# Altium PCB Multislope_Board.PcbDoc (part 1 of 2)
Units mil, origin at the board's own origin, x right, y up, seen from the top; angles counter-clockwise.
Board outline 6000 x 4000 mil, 2 copper layers (Top Layer, Bottom Layer); 93 components, 65 nets, 831 pads, 5 vias.
Unrouted connection lines stored in the file: 171.
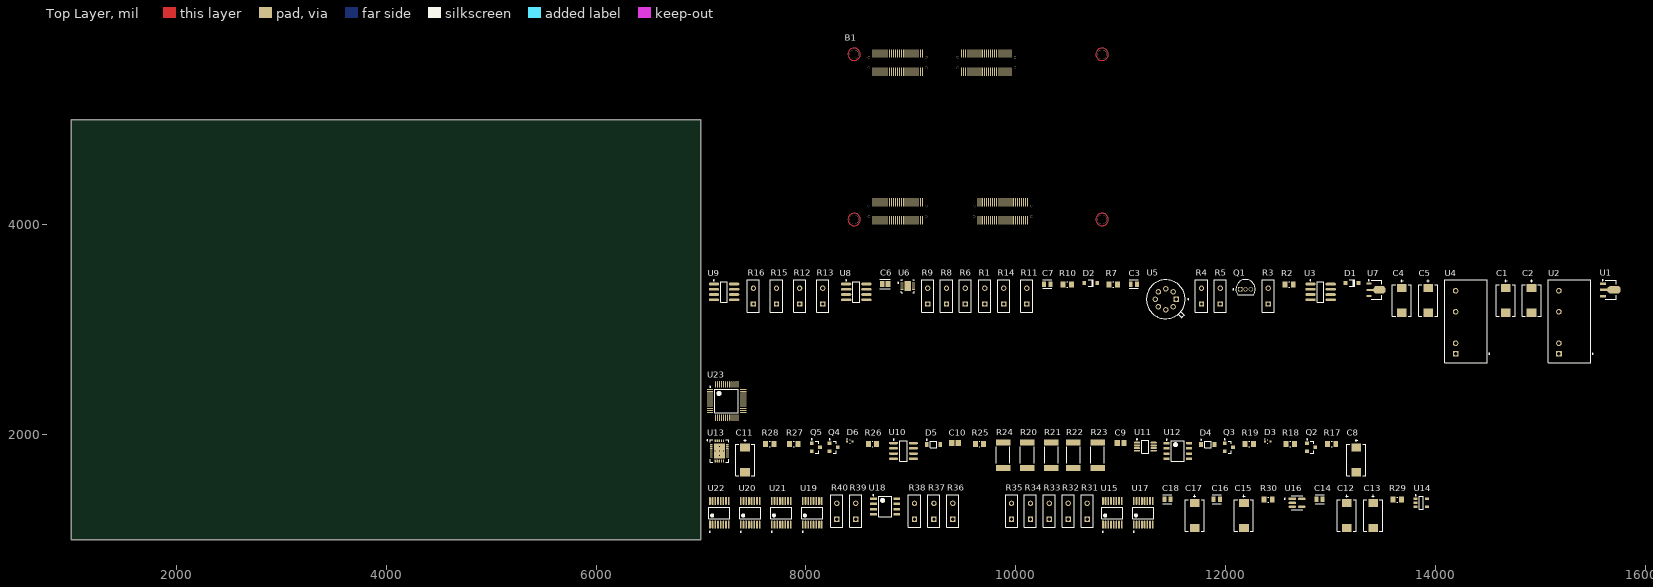
[diagram p0: Top Layer view]
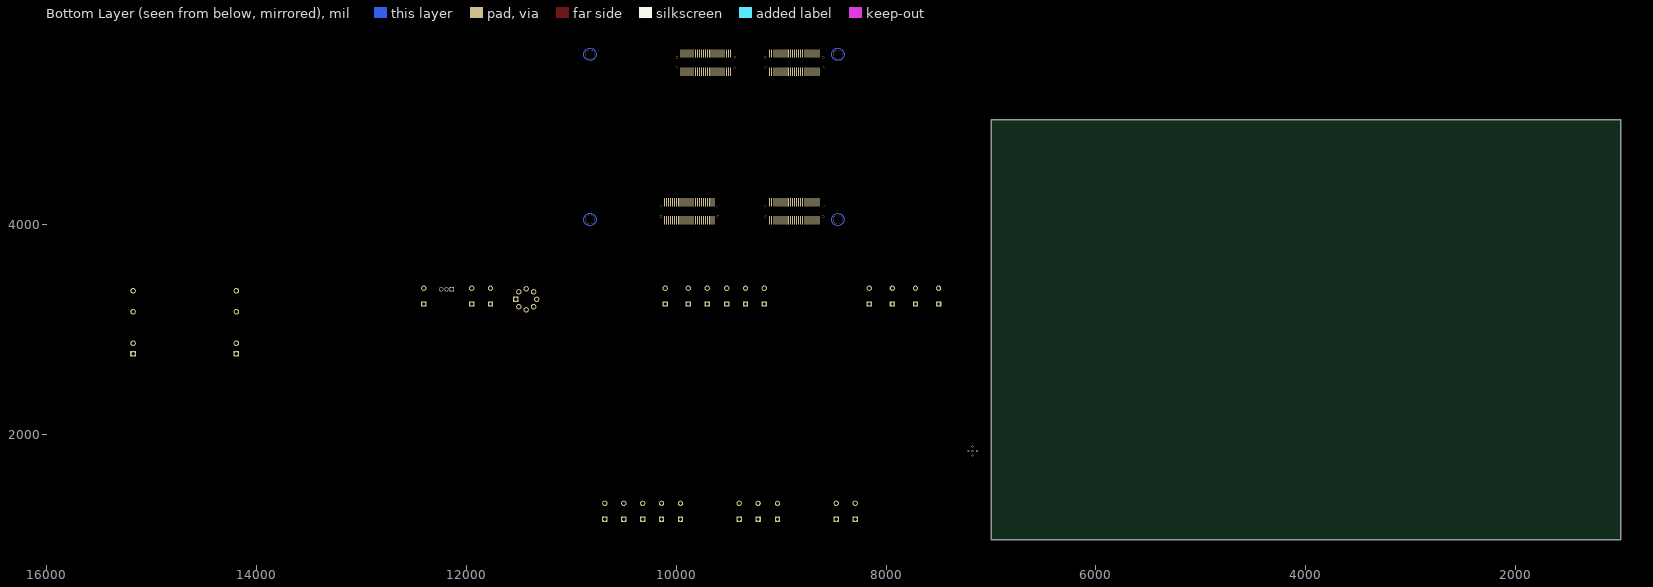
[diagram p1: Bottom Layer view, seen from below]

## Layer stack, top to bottom
Top Solder: solder mask 0.4, Solder Resist, Dk 3.5
Top Layer: signal copper 1.4
Dielectric 1: dielectric 12.6, FR-4, Dk 4.8
Bottom Layer: signal copper 1.4
Bottom Solder: solder mask 0.4, Solder Resist, Dk 3.5

## Board outline
1000,1000 7000,1000 7000,5000 1000,5000

## Design rules (kind name [scope] priority, off if disabled: settings)
Clearance [All] p1: gap=10 ignorepadtopadclearanceinfootprint=FALSE except(0: Arc-Hole Track-Hole SMDPad-Hole THPad-Hole Via-Hole Fill-Hole Poly-Hole Region-Hole Text-Hole)
PolygonConnect [All] p1: connectstyle=Relief reliefconductorwidth=10 reliefentries=4 polygonreliefangle="90 Angle" airgapwidth=10
RoutingVias [All] p1: holewidth=28 width=50 viastyle="Through Hole" minholewidth=28 minwidth=50 maxholewidth=28 maxwidth=50
SolderMaskExpansion [All] p1: expansion=4 istentingtop=FALSE
Width [All] p1: maxlimit=10 minlimit=10 preferedwidth=10
30 further rules are at their usual default settings.

## Classes and differential pairs
component class Vref: C1 C2 C3 C4 C5 C6 C7 D1 D2 Q1 R1 R2 R3 R4 R5 R6 R7 R8 R9 R10 R11 R12 R13 R14 R15 R16 U1 U2 U3 U4 U5 U6 U7 U8 U9
component class MCU: U23
component class Frontend: C8 C9 C10 C11 D3 D4 D5 D6 Q2 Q3 Q4 Q5 R17 R18 R19 R20 R21 R22 R23 R24 R25 R26 R27 R28 U10 U11 U12 U13
component class ADC_Core: B1 C12 C13 C14 C15 C16 C17 C18 R29 R30 R31 R32 R33 R34 R35 R37 R38 R39 R40 U14 U15 U16 U17 U19 U20 U21 U22

## Components (designator, comment, footprint, x,y, rotation, side; value= is the part's Value field where it differs from the comment)
B1 "ALCHITRY_ELEMENT" ELEMENT 10920.83,5722.87 r180 top
C1 "10uF 35V Tantalum" FP-T491D106K035AT-MFG 14670,3280 r90 top
C2 "10uF 35V Tantalum" FP-T491D106K035AT-MFG 14915,3280 r90 top
C3 "100nF" FP-C0805C-DN-MFG 11125,3435 r0 top value="0.10 μF"
C4 "10uF 35V Tantalum" FP-T491D106K035AT-MFG 13680,3280 r90 top
C5 "10uF 35V Tantalum" FP-T491D106K035AT-MFG 13930,3280 r90 top
C6 "08051A101JAT2A" FP-0805-L_2_01_0_2-W_1_25-IPC_C 8755,3435 r0 top
C7 "20nF" FP-C0805C-DN-MFG 10300,3435 r0 top value="0.10 μF"
C8 "T491D106K025AT" FP-T491D-MFG 13245,1760 r90 top
C9 "08055C104K4Z2A" CAPC2013X140X50NL20T25 11000,1920 r0 top
C10 "08055C104K4Z2A" CAPC2013X140X50NL20T25 9420,1920 r0 top
C11 "T491D106K025AT" FP-T491D-MFG 7420,1760 r90 top
C12 "10uF 35V Tantalum" FP-T491D106K035AT-MFG 13155,1230 r90 top
C13 "10uF 35V Tantalum" FP-T491D106K035AT-MFG 13405,1230 r90 top
C14 "100nF" FP-C0805C-DN-MFG 12895,1385 r0 top value="0.10 μF"
C15 "10uF 35V Tantalum" FP-T491D106K035AT-MFG 12175,1230 r90 top
C16 "100nF" FP-C0805C-DN-MFG 11915,1385 r0 top value="0.10 μF"
C17 "10uF 35V Tantalum" FP-T491D106K035AT-MFG 11705,1230 r90 top
C18 "10nF" FP-C0805C-DN-MFG 11445,1385 r0 top value="0.10 μF"
D1 "1N4148W-7-F" DIOD-SOD123-2_V 13205,3445 r0 top
D2 "1N4148W-7-F" DIOD-SOD123-2_V 10715,3445 r0 top
D3 "BAS716" ONSC-SOD-523-2-502-01_V 12400,1935 r0 top
D4 "MMSZ4680T1G" ONSC-SOD-123-2-425-04_V 11830,1905 r0 top
D5 "MMSZ4680T1G" ONSC-SOD-123-2-425-04_V 9215,1905 r0 top
D6 "BAS716" ONSC-SOD-523-2-502-01_V 8420,1935 r0 top
Q1 "2N3904" ONSC-TO-92-3-29-11 12190,3385 r0 top
Q2 "MMBF4391LT1G" ONSC-SOT-23-3-318-08_V 12815,1880 r0 top
Q3 "MMBF4391LT1G" ONSC-SOT-23-3-318-08_V 12030,1880 r0 top
Q4 "MMBF4391LT1G" ONSC-SOT-23-3-318-08_V 8265,1880 r0 top
Q5 "MMBF4391LT1G" ONSC-SOT-23-3-318-08_V 8095,1880 r0 top
R1 "VPG 3K5" FP-S102J-MFG 9705,3320 r90 top
R2 "1K" RESC2013X60X35ML10T20 12605,3430 r0 top
R3 "VPG 13K" FP-S102J-MFG 12405,3320 r90 top
R4 "VPG 70K" FP-S102J-MFG 11770,3320 r90 top
R5 "VPG 70K" FP-S102J-MFG 11950,3320 r90 top
R6 "VPG 10K" FP-S102J-MFG 9520,3320 r90 top
R7 "1M" RESC2013X60X35ML10T20 10930,3430 r0 top
R8 "VPG 3K5" FP-S102J-MFG 9340,3320 r90 top
R9 "VPG 3K5" FP-S102J-MFG 9160,3320 r90 top
R10 "10K" RESC2013X60X35ML10T20 10490,3430 r0 top
R11 "VPG 1K" FP-S102J-MFG 10105,3320 r90 top
R12 "VPG 10K" FP-S102J-MFG 7940,3320 r90 top
R13 "VPG 3K5" FP-S102J-MFG 8160,3320 r90 top
R14 "VPG 120R" FP-S102J-MFG 9885,3320 r90 top
R15 "VPG 3K5" FP-S102J-MFG 7720,3320 r90 top
R16 "VPG 3K5" FP-S102J-MFG 7500,3320 r90 top
R17 "47K" RESC2013X60X35ML10T20 13010,1910 r0 top
R18 "1K" RESC2013X60X35ML10T20 12615,1910 r0 top
R19 "10R" RESC2013X60X35ML10T20 12225,1910 r0 top
R20 "10K 2512" FP-CRCW2512-e3-MFG 10110,1805 r90 top
R21 "10K 2512" FP-CRCW2512-e3-MFG 10340,1805 r90 top
R22 "10K 2512" FP-CRCW2512-e3-MFG 10550,1805 r90 top
R23 "10K 2512" FP-CRCW2512-e3-MFG 10780,1805 r90 top
R24 "10K 2512" FP-CRCW2512-e3-MFG 9880,1805 r90 top
R25 "200K" RESC2013X60X35ML10T20 9655,1910 r0 top
R26 "10R" RESC2013X60X35ML10T20 8635,1910 r0 top
R27 "1K" RESC2013X60X35ML10T20 7885,1910 r0 top
R28 "47K" RESC2013X60X35ML10T20 7655,1910 r0 top
R29 "1K" RESC2013X60X35ML10T20 13635,1380 r0 top
R30 "220R" RESC2013X60X35ML10T20 12405,1380 r0 top
R31 "VPG" FP-S102J-MFG 10680,1270 r90 top
R32 "VPG" FP-S102J-MFG 10500,1270 r90 top
R33 "VPG" FP-S102J-MFG 10320,1270 r90 top
R34 "VPG" FP-S102J-MFG 10140,1270 r90 top
R35 "VPG" FP-S102J-MFG 9960,1270 r90 top
R36 "VPG" FP-S102J-MFG 9400,1270 r90 top
R37 "VPG" FP-S102J-MFG 9220,1270 r90 top
R38 "VPG" FP-S102J-MFG 9035,1270 r90 top
R39 "VPG" FP-S102J-MFG 8475,1270 r90 top
R40 "VPG" FP-S102J-MFG 8295,1270 r90 top
U1 "L78L15ABUTR" SOT-89_N 15670,3380 r0 top
U2 "R05P215S/P" FP-RxxP2xx-MFG 15275,3080 r90 top
U3 "LT1013DS8#PBF" LT-S8-8_M 12905,3360 r0 top
U4 "R05P215S/P" FP-RxxP2xx-MFG 14290,3080 r90 top
U5 "LTZ1000ACH#PBF" FP-H-8-05-08-1320-MFG 11430,3290 r0 top
U6 "ADA4523-1BCPZ" FP-CP-8-29-MFG 8970,3415 r0 top
U7 "L79L15ACUTR" SOT-89_L 13435,3380 r0 top
U8 "LT1128CS8#PBF" LT-S8-8_M 8480,3360 r0 top
U9 "LT1128CS8#PBF" LT-S8-8_M 7220,3360 r0 top
U10 "LT1678CS8#PBF" LT-S8-8_N 8930,1845 r0 top
U11 "ADA4528-1ARMZ" ADI-RM-8_L 11235,1885 r0 top
U12 "TL061IDR" D0008A_N 11545,1845 r0 top
U13 "AD5760BCPZ" CP-24-5_L 7175,1845 r0 top
U14 "TLV70025DDCR" DDC0005A_N 13865,1350 r0 top
U15 "TMUX1133PWR" FP-PW0016A-IPC_A 10920,1255 r90 top
U16 "TLV70033DDCR" FP-DDC0005A-IPC_A 12680,1350 r0 top
U17 "TMUX1133PWR" FP-PW0016A-IPC_A 11215,1255 r90 top
U18 "OPA140AID" D0008A_M 8755,1315 r0 top
U19 "TMUX1133PWR" FP-PW0016A-IPC_A 8060,1255 r90 top
U20 "TMUX1133PWR" FP-PW0016A-IPC_A 7470,1255 r90 top
U21 "TMUX1133PWR" FP-PW0016A-IPC_A 7765,1255 r90 top
U22 "TMUX1133PWR" FP-PW0016A-IPC_A 7175,1255 r90 top
U23 "STM32F103CBT6" STM-LQFP48_L 7245,2320 r0 top

## Footprints (in the part's own frame and the unit in brackets; to place one, negate y for a bottom-side part, rotate by r counter-clockwise, add the part's x,y. Pads: shape width x height; smd on the part's side, far side on the other; paste and mask are expansions set on the pad)
ADI-RM-8_L [mm] "SOP, 8-Leads, Body 3x3mm, Pitch 0.65mm, IPC High Density"
  oval 1.5x0.45 smd: 1(-2.025,0.975) 2(-2.025,0.325) 3(-2.025,-0.325) 4(-2.025,-0.975) 5(2.025,-0.975) 6(2.025,-0.325) 7(2.025,0.325) 8(2.025,0.975)
  silkscreen extent -2.15,-1.6 0.87,1.87, body extent -1.6,-1.6 1.6,1.6, height 1.1
CAPC2013X140X50NL20T25 [mm] "Chip Capacitor, 2-Leads, Body 2.00x1.25mm, IPC Medium Density"
  rect 1.3x1.45 smd: 1(-0.8,0) 2(0.8,0)
  body extent -1.1,-0.72 1.1,0.72, height 1.4
CP-24-5_L [mm] "QFN, 24-Leads, Body 4x5mm, Pitch 0.5mm, Thermal Pad 2.65x3.65mm, IPC High Density"
  oval 0.7x0.3 smd: 1(-1.95,1.5) 2(-1.95,1) 3(-1.95,0.5) 4(-1.95,0) 5(-1.95,-0.5) 6(-1.95,-1) 7(-1.95,-1.5) 13(1.95,-1.5) 14(1.95,-1) 15(1.95,-0.5) 16(1.95,0) 17(1.95,0.5) 18(1.95,1) 19(1.95,1.5)
  oval 0.3x0.7 smd: 8(-1,-2.45) 9(-0.5,-2.45) 10(0,-2.45) 11(0.5,-2.45) 12(1,-2.45) 20(1,2.45) 21(0.5,2.45) 22(0,2.45) 23(-0.5,2.45) 24(-1,2.45)
  rect 2.65x3.65 smd paste-1.325: 25(0,0)
  silkscreen extent -3,-2.73 2.23,2.73, body extent -2.07,-2.57 2.08,2.58, height 1
D0008A_M [mm] "SOIC, 8-Leads, Body 5x4mm, Pitch 1.27mm, IPC Low Density"
  rrect15% 1.65x0.65 smd: 1(-2.825,1.905) 2(-2.825,0.635) 3(-2.825,-0.635) 4(-2.825,-1.905) 5(2.825,-1.905) 6(2.825,-0.635) 7(2.825,0.635) 8(2.825,1.905)
  silkscreen extent -2.95,-2.5 1.6,2.9, body extent -3,-2.45 3,2.45, height 1.63
D0008A_N [mm] "SOIC, 8-Leads, Body 5x4mm, Pitch 1.27mm, IPC Medium Density"
  rrect17% 1.45x0.6 smd: 1(-2.725,1.905) 2(-2.725,0.635) 3(-2.725,-0.635) 4(-2.725,-1.905) 5(2.725,-1.905) 6(2.725,-0.635) 7(2.725,0.635) 8(2.725,1.905)
  silkscreen extent -2.85,-2.5 1.6,2.88, body extent -3,-2.45 3,2.45, height 1.63
DDC0005A_N [mm] "SOT23, 5-Leads, Body 3.05x1.75mm, Pitch 0.95mm, IPC Medium Density"
  rrect17% 1x0.6 smd: 1(-1.375,0.95) 2(-1.375,0) 3(-1.375,-0.95) 4(1.375,-0.95) 5(1.375,0.95)
  silkscreen extent -1.5,-1.55 0.5,1.92, body extent -0.88,-1.52 0.87,1.53, height 1.1
DIOD-SOD123-2_V [mm] "SOD123, 2-Leads, Body 2.7x1.55mm, Height 1.45mm"
  rect 0.9x0.95 smd: 1(-1.575,0) 2(1.575,0)
  silkscreen extent -0.64,-0.82 0.64,0.77, body extent -1.35,-0.77 1.35,0.77, height 1.45
ELEMENT [mm]
  rect 0.25x2 smd far side: AB_1(20.5,38.3) AB_2(21,38.3) AB_3(21.5,38.3) AB_4(22,38.3) AB_5(22.5,38.3) AB_6(23,38.3) AB_7(23.5,38.3) AB_8(24,38.3) AB_9(24.5,38.3) AB_10(25,38.3) AB_11(25.5,38.3) AB_12(26,38.3) AB_13(26.5,38.3) AB_14(27,38.3) AB_15(27.5,38.3) AB_16(28,38.3) AB_17(28.5,38.3) AB_18(29,38.3) AB_19(29.5,38.3) AB_20(30,38.3) AB_21(30.5,38.3) AB_22(31,38.3) AB_23(31.5,38.3) AB_24(32,38.3) AB_25(32.5,38.3) AB_26(32.5,42.7) AB_27(32,42.7) AB_28(31.5,42.7) AB_29(31,42.7) AB_30(30.5,42.7) AB_31(30,42.7) AB_32(29.5,42.7) AB_33(29,42.7) AB_34(28.5,42.7) AB_35(28,42.7) AB_36(27.5,42.7) AB_37(27,42.7) AB_38(26.5,42.7) AB_39(26,42.7) AB_40(25.5,42.7) AB_41(25,42.7) AB_42(24.5,42.7) AB_43(24,42.7) AB_44(23.5,42.7) AB_45(23,42.7) AB_46(22.5,42.7) AB_47(22,42.7) AB_48(21.5,42.7) AB_49(21,42.7) AB_50(20.5,42.7) BB_1(46,38.3) BB_2(46.5,38.3) BB_3(47,38.3) BB_4(47.5,38.3) BB_5(48,38.3) BB_6(48.5,38.3) BB_7(49,38.3) BB_8(49.5,38.3) BB_9(50,38.3) BB_10(50.5,38.3) BB_11(51,38.3) BB_12(51.5,38.3) BB_13(52,38.3) BB_14(52.5,38.3) BB_15(53,38.3) BB_16(53.5,38.3) BB_17(54,38.3) BB_18(54.5,38.3) BB_19(55,38.3) BB_20(55.5,38.3) BB_21(56,38.3) BB_22(56.5,38.3) BB_23(57,38.3) BB_24(57.5,38.3) BB_25(58,38.3) BB_26(58,42.7) BB_27(57.5,42.7) BB_28(57,42.7) BB_29(56.5,42.7) BB_30(56,42.7) BB_31(55.5,42.7) BB_32(55,42.7) BB_33(54.5,42.7) BB_34(54,42.7) BB_35(53.5,42.7) BB_36(53,42.7) BB_37(52.5,42.7) BB_38(52,42.7) BB_39(51.5,42.7) BB_40(51,42.7) BB_41(50.5,42.7) BB_42(50,42.7) BB_43(49.5,42.7) BB_44(49,42.7) BB_45(48.5,42.7) BB_46(48,42.7) BB_47(47.5,42.7) BB_48(47,42.7) BB_49(46.5,42.7) BB_50(46,42.7) CB_1(24.5,2.3) CB_2(25,2.3) CB_3(25.5,2.3) CB_4(26,2.3) CB_5(26.5,2.3) CB_6(27,2.3) CB_7(27.5,2.3) CB_8(28,2.3) CB_9(28.5,2.3) CB_10(29,2.3) CB_11(29.5,2.3) CB_12(30,2.3) CB_13(30.5,2.3) CB_14(31,2.3) CB_15(31.5,2.3) CB_16(32,2.3) CB_17(32.5,2.3) CB_18(33,2.3) CB_19(33.5,2.3) CB_20(34,2.3) CB_21(34.5,2.3) CB_22(35,2.3) CB_23(35.5,2.3) CB_24(36,2.3) CB_25(36.5,2.3) CB_26(36.5,6.7) CB_27(36,6.7) CB_28(35.5,6.7) CB_29(35,6.7) CB_30(34.5,6.7) CB_31(34,6.7) CB_32(33.5,6.7) CB_33(33,6.7) CB_34(32.5,6.7) CB_35(32,6.7) CB_36(31.5,6.7) CB_37(31,6.7) CB_38(30.5,6.7) CB_39(30,6.7) CB_40(29.5,6.7) CB_41(29,6.7) CB_42(28.5,6.7) CB_43(28,6.7) CB_44(27.5,6.7) CB_45(27,6.7) CB_46(26.5,6.7) CB_47(26,6.7) CB_48(25.5,6.7) CB_49(25,6.7) CB_50(24.5,6.7) DB_1(46,2.3) DB_2(46.5,2.3) DB_3(47,2.3) DB_4(47.5,2.3) DB_5(48,2.3) DB_6(48.5,2.3) DB_7(49,2.3) DB_8(49.5,2.3) DB_9(50,2.3) DB_10(50.5,2.3) DB_11(51,2.3) DB_12(51.5,2.3) DB_13(52,2.3) DB_14(52.5,2.3) DB_15(53,2.3) DB_16(53.5,2.3) DB_17(54,2.3) DB_18(54.5,2.3) DB_19(55,2.3) DB_20(55.5,2.3) DB_21(56,2.3) DB_22(56.5,2.3) DB_23(57,2.3) DB_24(57.5,2.3) DB_25(58,2.3) DB_26(58,6.7) DB_27(57.5,6.7) DB_28(57,6.7) DB_29(56.5,6.7) DB_30(56,6.7) DB_31(55.5,6.7) DB_32(55,6.7) DB_33(54.5,6.7) DB_34(54,6.7) DB_35(53.5,6.7) DB_36(53,6.7) DB_37(52.5,6.7) DB_38(52,6.7) DB_39(51.5,6.7) DB_40(51,6.7) DB_41(50.5,6.7) DB_42(50,6.7) DB_43(49.5,6.7) DB_44(49,6.7) DB_45(48.5,6.7) DB_46(48,6.7) DB_47(47.5,6.7) DB_48(47,6.7) DB_49(46.5,6.7) DB_50(46,6.7)
  rect 0.25x2 smd: AT_1(20.5,38.3) AT_2(21,38.3) AT_3(21.5,38.3) AT_4(22,38.3) AT_5(22.5,38.3) AT_6(23,38.3) AT_7(23.5,38.3) AT_8(24,38.3) AT_9(24.5,38.3) AT_10(25,38.3) AT_11(25.5,38.3) AT_12(26,38.3) AT_13(26.5,38.3) AT_14(27,38.3) AT_15(27.5,38.3) AT_16(28,38.3) AT_17(28.5,38.3) AT_18(29,38.3) AT_19(29.5,38.3) AT_20(30,38.3) AT_21(30.5,38.3) AT_22(31,38.3) AT_23(31.5,38.3) AT_24(32,38.3) AT_25(32.5,38.3) AT_26(32.5,42.7) AT_27(32,42.7) AT_28(31.5,42.7) AT_29(31,42.7) AT_30(30.5,42.7) AT_31(30,42.7) AT_32(29.5,42.7) AT_33(29,42.7) AT_34(28.5,42.7) AT_35(28,42.7) AT_36(27.5,42.7) AT_37(27,42.7) AT_38(26.5,42.7) AT_39(26,42.7) AT_40(25.5,42.7) AT_41(25,42.7) AT_42(24.5,42.7) AT_43(24,42.7) AT_44(23.5,42.7) AT_45(23,42.7) AT_46(22.5,42.7) AT_47(22,42.7) AT_48(21.5,42.7) AT_49(21,42.7) AT_50(20.5,42.7) BT_1(46,38.3) BT_2(46.5,38.3) BT_3(47,38.3) BT_4(47.5,38.3) BT_5(48,38.3) BT_6(48.5,38.3) BT_7(49,38.3) BT_8(49.5,38.3) BT_9(50,38.3) BT_10(50.5,38.3) BT_11(51,38.3) BT_12(51.5,38.3) BT_13(52,38.3) BT_14(52.5,38.3) BT_15(53,38.3) BT_16(53.5,38.3) BT_17(54,38.3) BT_18(54.5,38.3) BT_19(55,38.3) BT_20(55.5,38.3) BT_21(56,38.3) BT_22(56.5,38.3) BT_23(57,38.3) BT_24(57.5,38.3) BT_25(58,38.3) BT_26(58,42.7) BT_27(57.5,42.7) BT_28(57,42.7) BT_29(56.5,42.7) BT_30(56,42.7) BT_31(55.5,42.7) BT_32(55,42.7) BT_33(54.5,42.7) BT_34(54,42.7) BT_35(53.5,42.7) BT_36(53,42.7) BT_37(52.5,42.7) BT_38(52,42.7) BT_39(51.5,42.7) BT_40(51,42.7) BT_41(50.5,42.7) BT_42(50,42.7) BT_43(49.5,42.7) BT_44(49,42.7) BT_45(48.5,42.7) BT_46(48,42.7) BT_47(47.5,42.7) BT_48(47,42.7) BT_49(46.5,42.7) BT_50(46,42.7) CT_1(24.5,2.3) CT_2(25,2.3) CT_3(25.5,2.3) CT_4(26,2.3) CT_5(26.5,2.3) CT_6(27,2.3) CT_7(27.5,2.3) CT_8(28,2.3) CT_9(28.5,2.3) CT_10(29,2.3) CT_11(29.5,2.3) CT_12(30,2.3) CT_13(30.5,2.3) CT_14(31,2.3) CT_15(31.5,2.3) CT_16(32,2.3) CT_17(32.5,2.3) CT_18(33,2.3) CT_19(33.5,2.3) CT_20(34,2.3) CT_21(34.5,2.3) CT_22(35,2.3) CT_23(35.5,2.3) CT_24(36,2.3) CT_25(36.5,2.3) CT_26(36.5,6.7) CT_27(36,6.7) CT_28(35.5,6.7) CT_29(35,6.7) CT_30(34.5,6.7) CT_31(34,6.7) CT_32(33.5,6.7) CT_33(33,6.7) CT_34(32.5,6.7) CT_35(32,6.7) CT_36(31.5,6.7) CT_37(31,6.7) CT_38(30.5,6.7) CT_39(30,6.7) CT_40(29.5,6.7) CT_41(29,6.7) CT_42(28.5,6.7) CT_43(28,6.7) CT_44(27.5,6.7) CT_45(27,6.7) CT_46(26.5,6.7) CT_47(26,6.7) CT_48(25.5,6.7) CT_49(25,6.7) CT_50(24.5,6.7) DT_1(46,2.3) DT_2(46.5,2.3) DT_3(47,2.3) DT_4(47.5,2.3) DT_5(48,2.3) DT_6(48.5,2.3) DT_7(49,2.3) DT_8(49.5,2.3) DT_9(50,2.3) DT_10(50.5,2.3) DT_11(51,2.3) DT_12(51.5,2.3) DT_13(52,2.3) DT_14(52.5,2.3) DT_15(53,2.3) DT_16(53.5,2.3) DT_17(54,2.3) DT_18(54.5,2.3) DT_19(55,2.3) DT_20(55.5,2.3) DT_21(56,2.3) DT_22(56.5,2.3) DT_23(57,2.3) DT_24(57.5,2.3) DT_25(58,2.3) DT_26(58,6.7) DT_27(57.5,6.7) DT_28(57,6.7) DT_29(56.5,6.7) DT_30(56,6.7) DT_31(55.5,6.7) DT_32(55,6.7) DT_33(54.5,6.7) DT_34(54,6.7) DT_35(53.5,6.7) DT_36(53,6.7) DT_37(52.5,6.7) DT_38(52,6.7) DT_39(51.5,6.7) DT_40(51,6.7) DT_41(50.5,6.7) DT_42(50,6.7) DT_43(49.5,6.7) DT_44(49,6.7) DT_45(48.5,6.7) DT_46(48,6.7) DT_47(47.5,6.7) DT_48(47,6.7) DT_49(46.5,6.7) DT_50(46,6.7)
  round 2.2 hole 2.2 unplated: MH1(2.5,2.5) MH2(2.5,42.5) MH3(62.5,42.5) MH4(62.5,2.5)
  round 0.55 hole 0.55 unplated: MH5(58.95,39.25) MH6(45.05,39.25) MH7(33.45,39.25) MH8(19.55,39.25) MH9(58.95,3.25) MH10(45.05,3.25) MH11(37.45,3.25) MH12(23.55,3.25) MH13(58.95,5.75) MH14(45.05,5.75) MH15(37.45,5.75) MH16(23.55,5.75) MH17(58.95,41.75) MH18(45.05,41.75) MH19(33.45,41.75) MH20(19.55,41.75)
  Top Layer circle w0.254: c62.5,2.5 r1.5
  Top Layer circle w0.254: c62.5,42.5 r1.5
  Top Layer circle w0.254: c2.5,42.5 r1.5
  Top Layer circle w0.254: c2.5,2.5 r1.5
  Bottom Layer circle w0.254: c2.5,2.5 r1.5
  Bottom Layer circle w0.254: c2.5,42.5 r1.5
  Bottom Layer circle w0.254: c62.5,42.5 r1.5
  Bottom Layer circle w0.254: c62.5,2.5 r1.5
FP-0805-L_2_01_0_2-W_1_25-IPC_C [mil]
  rect 43.49x53.39 smd paste+0 mask+0: 1(-27.79,0) 2(27.79,0)
  silkscreen extent -50,-44 50,44, body extent -53,-32 53,32, height 10
FP-C0805C-DN-MFG [mm]
  rect 0.95x1.35 smd paste+0 mask+0: 1(-0.75,0) 2(0.75,0)
  silkscreen extent -1.1,-1.07 1.1,1.07, body extent -1.4,-0.85 1.4,0.85, height 0.25
FP-CP-8-29-MFG [mm]
  rect 0.7x0.25 smd paste+0 mask+0: 1(-1.4,0.75) 2(-1.4,0.25) 3(-1.4,-0.25) 4(-1.4,-0.75) 5(1.4,-0.75) 6(1.4,-0.25) 7(1.4,0.25) 8(1.4,0.75)
  rect 1.65x2.38 smd paste+0 mask+0: 9(0,0)
  silkscreen extent -2.42,-1.55 1.55,1.55, body extent -1.85,-1.65 1.85,1.65, height 0.25
FP-CRCW2512-e3-MFG [mm]
  rect 1.45x3.5 smd paste+0 mask+0: 1(-3.1,0) 2(3.1,0)
  silkscreen extent -2,-1.65 2,1.65, body extent -3.93,-1.85 3.93,1.85, height 0.25
FP-DDC0005A-IPC_A [mm]
  rect 1.854x0.612 smd paste+0 mask+0: 1(-1.15,0.95)
  rrect100% 1.854x0.612 smd paste+0 mask+0: 2(-1.15,0) 3(-1.15,-0.95) 4(1.15,-0.95) 5(1.15,0.95)
  silkscreen extent -3.05,-1.7 1.4,1.7, body extent -2.58,-1.95 2.58,1.95, height 0.25
FP-H-8-05-08-1320-MFG [mm]
  rect 1.3x1.3 hole 0.8 paste-1000 mask+0: 1(2.54,0)
  round 1.3 hole 0.8 paste-1000 mask+0: 2(1.796,1.796) 3(0,2.54) 4(-1.796,1.796) 5(-2.54,0) 6(-1.796,-1.796) 7(0,-2.54) 8(1.796,-1.796)
  silkscreen extent -4.7,-4.7 5.6,4.7, body extent -4.8,-4.8 4.8,4.8, height 0.25
FP-PW0016A-IPC_A [mm]
  rect 1.955x0.421 smd paste+0 mask+0: 1(-2.875,2.275)
  rrect100% 1.955x0.421 smd paste+0 mask+0: 2(-2.875,1.625) 3(-2.875,0.975) 4(-2.875,0.325) 5(-2.875,-0.325) 6(-2.875,-0.975) 7(-2.875,-1.625) 8(-2.875,-2.275) 9(2.875,-2.275) 10(2.875,-1.625) 11(2.875,-0.975) 12(2.875,-0.325) 13(2.875,0.325) 14(2.875,0.975) 15(2.875,1.625) 16(2.875,2.275)
  silkscreen extent -4.73,-2.5 1.4,2.5, body extent -4.35,-3 4.35,3, height 0.25
FP-RxxP2xx-MFG [mm]
  rect 1.35x1.35 hole 0.85 paste-1000 mask+0: 1(-7.85,2.5)
  round 1.35 hole 0.85 paste-1000 mask+0: 2(-5.31,2.5) 5(2.31,2.5) 7(7.39,2.5)
  silkscreen extent -10,-5.75 10,5.15, body extent -10.1,-5.25 10.1,5.25, height 0.25
FP-S102J-MFG [mm]
  rect 1.3x1.3 hole 0.8 paste-1000 mask+0: 1(-1.905,0)
  round 1.3 hole 0.8 paste-1000 mask+0: 2(1.905,0)
  silkscreen extent -3.94,-1.46 3.94,1.46, body extent -4.04,-1.56 4.04,1.56, height 0.25
FP-T491D106K035AT-MFG [mm]
  rect 1.99x2.33 smd paste+0 mask+0: 1(-3.01,0) 2(3.01,0)
  silkscreen extent -3.8,-2.3 5,2.3, body extent -4.13,-2.42 4.13,2.42, height 0.25
FP-T491D-MFG [mm]
  rect 1.99x2.33 smd paste+0 mask+0: 1(-3.01,0) 2(3.01,0)
  silkscreen extent -3.8,-2.3 5,2.3, body extent -4.13,-2.42 4.13,2.42, height 0.25
LT-S8-8_M [mm] "SOIC, 8-Leads, Body 4.9x3.9mm, Pitch 1.27mm, IPC Low Density"
  oval 2.5x0.7 smd: 1(-2.45,1.905) 2(-2.45,0.635) 3(-2.45,-0.635) 4(-2.45,-1.905) 5(2.45,-1.905) 6(2.45,-0.635) 7(2.45,0.635) 8(2.45,1.905)
  silkscreen extent -2.57,-2.5 0.8,2.93, body extent -2,-2.5 2,2.5, height 1.76
LT-S8-8_N [mm] "SOIC, 8-Leads, Body 4.9x3.9mm, Pitch 1.27mm, IPC Medium Density"
  oval 2.2x0.6 smd: 1(-2.4,1.905) 2(-2.4,0.635) 3(-2.4,-0.635) 4(-2.4,-1.905) 5(2.4,-1.905) 6(2.4,-0.635) 7(2.4,0.635) 8(2.4,1.905)
  silkscreen extent -2.52,-2.5 0.9,2.88, body extent -2,-2.5 2,2.5, height 1.76
ONSC-SOD-123-2-425-04_V [mm] "SOD, 2-Leads, Body 2.69x1.6mm"
  rect 0.91x1.22 smd: 1(-1.635,0) 2(1.635,0)
  silkscreen extent -1.76,-0.8 0.78,1.28, body extent -1.35,-0.8 1.35,0.8, height 1.35
ONSC-SOD-523-2-502-01_V [mm] "SOD, 2-Leads, Body 1.2x0.8mm"
  rect 0.48x0.4 smd: 1(-0.66,0) 2(0.66,0)
  silkscreen extent -0.75,-0.4 0.07,0.65, body extent -0.6,-0.4 0.6,0.4, height 0.7
ONSC-SOT-23-3-318-08_V [mm] "SOT23, 3-Leads, Body 2.92x1.3mm, Pitch 0.95mm"
  rect 0.9x0.8 smd: 1(-1,0.95) 2(-1,-0.95) 3(1,0)
  silkscreen extent -1.12,-1.46 0.65,2.02, body extent -0.65,-1.46 0.65,1.46, height 1.11
ONSC-TO-92-3-29-11 [mm] "TO, 3-Leads, Body Dia 4.7mm, Pitch 1.27mm"
  rect 1.05x1.05 hole 0.8: 1(-1.27,0)
  round 1.05 hole 0.8: 2(0,0) 3(1.27,0)
  silkscreen extent -3.07,-1.34 2.35,2.35, body extent -2.35,-1.33 2.36,2.36, height 7.87
RESC2013X60X35ML10T20 [mm] "Chip Resistor, 2-Leads, Body 2.1x1.35mm, IPC Low Density"
  rect 1.2x1.45 smd: 1(-1,0) 2(1,0)
  silkscreen extent -0.1,-0.63 0.1,0.63, body extent -1.05,-0.68 1.05,0.67, height 0.6
SOT-89_L [mm] "SOT89, 3-Leads, Body 4.5x2.4 mm, Pitch 1.5mm, Lead Span 4.1mm, IPC High Density"
  rect 1.2x0.5 smd: 1(-1.7,1.5) 3(-1.7,-1.5)
  rect 1.6x0.5 smd: 2(-1.5,0)
  oct 3x1.8 smd: 2(0.8,0)
  silkscreen extent -1.97,-2.3 1.4,2.42, body extent -1.2,-2.3 1.4,2.3, height 1.6
SOT-89_N [mm] "SOT89, 3-Leads, Body 4.5x2.4 mm, Pitch 1.5mm, Lead Span 4.1mm, IPC Medium Density"
  rect 1.4x0.6 smd: 1(-1.9,1.5) 3(-1.9,-1.5)
  rect 1.8x0.6 smd: 2(-1.7,0)
  oct 3.2x1.9 smd: 2(0.8,0)
  silkscreen extent -2.07,-2.3 1.3,2.47, body extent -1.3,-2.3 1.3,2.3, height 1.6
STM-LQFP48_L [mm] "QFP, 48-Leads, Body 7x7mm, Pitch 0.5mm, IPC High Density"
  oval 1.55x0.25 smd: 1(-4.025,2.75) 2(-4.025,2.25) 3(-4.025,1.75) 4(-4.025,1.25) 5(-4.025,0.75) 6(-4.025,0.25) 7(-4.025,-0.25) 8(-4.025,-0.75) 9(-4.025,-1.25) 10(-4.025,-1.75) 11(-4.025,-2.25) 12(-4.025,-2.75) 25(4.025,-2.75) 26(4.025,-2.25) 27(4.025,-1.75) 28(4.025,-1.25) 29(4.025,-0.75) 30(4.025,-0.25) 31(4.025,0.25) 32(4.025,0.75) 33(4.025,1.25) 34(4.025,1.75) 35(4.025,2.25) 36(4.025,2.75)
  oval 0.25x1.55 smd: 13(-2.75,-4.025) 14(-2.25,-4.025) 15(-1.75,-4.025) 16(-1.25,-4.025) 17(-0.75,-4.025) 18(-0.25,-4.025) 19(0.25,-4.025) 20(0.75,-4.025) 21(1.25,-4.025) 22(1.75,-4.025) 23(2.25,-4.025) 24(2.75,-4.025) 37(2.75,4.025) 38(2.25,4.025) 39(1.75,4.025) 40(1.25,4.025) 41(0.75,4.025) 42(0.25,4.025) 43(-0.25,4.025) 44(-0.75,4.025) 45(-1.25,4.025) 46(-1.75,4.025) 47(-2.25,4.025) 48(-2.75,4.025)
  silkscreen extent -4.15,-2.85 2.85,3.55, body extent -3.5,-3.5 3.5,3.5, height 1.6

## Part data
B1: Package=ELEMENT, DeviceSetName=ALCHITRY_ELEMENT, GateName_1=A, GateName_2=B, GateName_3=C, GateName_4=D, LibraryName=alchitry_elements, SymbolName_1=FE25-2, SymbolName_2=FE25-2, SymbolName_3=FE25-2, SymbolName_4=FE25-2
C1 C2 C4 C5 C12 C13 C15 C17: library part CMP-2000-07580-2, "CAP TANT 10UF 10% 35V 2917", Capacitance=10uF, Case Code (Imperial)=2917, Case Code (Metric)=7343, Dielectric Material=Tantalum, ESR (Equivalent Series Resistance)=1R, Leakage Current=3.5uA, Max Operating Temperature=125°C, Min Operating Temperature=-55°C, Package Quantity=1, Tolerance=20%, Voltage=35V, Case/Package=2917, Depth=4.3mm, Dissipation Factor=6%, Features="General Purpose", Height=2.8mm, Height - Seated (Max)=0.122inch, Lead Free="Lead Free", Length=7.3mm, Life (Hours)=2000Hour, Mount="Surface Mount", Number of Pins=2, Packaging="Tape and Reel", Polarity=Polar, Radiation Hardening=No, REACH SVHC="No SVHC", RoHS Compliant=Yes, Termination=SMD/SMT, Voltage Rating=35V, Voltage Rating (DC)=35V, Width=4.3mm
C3 C7 C14 C16 C18: library part CMP-2007-00279-2, "CAP CER 0.1UF 50V X7R 0805", Capacitance="0.10 μF", Manufacturer=KEMET, Manufacturer Part Number=C0805C104K5RACTU, Package=C0805C-DN, Temperature="-55°C to +125°C", Temperature Characteristic=X7R, Temperature Coefficient=30ppm/°C, Temperature Range High=+125°C, Temperature Range Low=-55°C, Tolerance=0.1, Voltage Rating="50 V", Automotive=No, Category=Cap, ComponentLink2Description=Datasheet, ComponentLink2URL=https://content.kemet.com/datasheets/KEM_C1003_C0G_SMD.pdf, Device Class L1="Passive Components", Device Class L2=Capacitors, Device Class L3="Ceramic Capacitors", Digikey Description="CAP CER 0.1UF 50V X7R 0805", Height=0.88mm, Ipc Land Pattern Name=CAPC200125X78, Lead Free=Yes, Material=Ceramic, Mouser Description="Cap Ceramic 0.1uF 50V X7R 10% SMD 2.0 x 1.2 mm 125 C Paper T/R", Octopart=https://octopart.com/c0805c104k5ractu-kemet-143926, RoHS=TRUE
C6: library part CMP-2007-04121-2, "General Purpose Ceramic Capacitor, 0805, 100pF, 5%, C0G, 30ppm/°C, 100V", Capacitance=100pF, Case Code (Imperial)=0805, Case Code (Metric)=2012, Dielectric=C0G, Insulation Resistance=100GR, Max Operating Temperature=125°C, Min Operating Temperature=-55°C, Package Quantity=1, Temperature Coefficient=30ppm/°C, Tolerance=5%, Voltage=100V, Case/Package=0805, Construction=Flat, Contact Plating=Tin, Depth=1.25mm, Height=0.94mm, Lead Free="Lead Free", Length=2.01mm, Mount="Surface Mount", Number of Pins=2, Packaging="Tape and Reel", Radiation Hardening=No, REACH SVHC="No SVHC", RoHS Compliant=Yes, Series=-, Size=0.94mm, Termination=SMD/SMT, Thickness=0.037inch, Voltage Rating=100V, Voltage Rating (DC)=100V, Width=0.049inch
C8 C11: library part CMP-2000-07200-2, "CAP TANT 10UF 10% 25V 2917", Capacitance=10uF, Case Code (Imperial)=2917, Case Code (Metric)=7343, Dielectric Material=Tantalum, ESR (Equivalent Series Resistance)=1R, Leakage Current=2.5uA, Max Operating Temperature=125°C, Min Operating Temperature=-55°C, Package Quantity=1, Ripple Current=387mA, Tolerance=20%, Voltage=25V, Case/Package=2917, Depth=4.3mm, Dissipation Factor=6%, Features="General Purpose", Height=2.8mm, Height - Seated (Max)=0.122inch, Lead Free="Lead Free", Length=7.3mm, Life (Hours)=2000Hour, Mount="Surface Mount", Number of Pins=2, Packaging="Tape and Reel", Polarity=Polar, Radiation Hardening=No, REACH SVHC="No SVHC", Termination=SMD/SMT, Voltage Rating=25V, Voltage Rating (DC)=25V, Width=4.3mm
C9 C10: library part CMP-2007-04629-1, Manufacturer="AVX Interconnect / Elco", Part Number=08055C104K4Z2A
D1 D2: library part CMP-2000-04932-2, "Fast Switching Diode, 100 V, 0.15 A, -65 to 150 degC, 2-Pin?SOD123, RoHS, Tape and Reel", If - Forward Current=0.15A, Ir - Reverse Current=1uA, Manufacturer=DiodesIncorporated, Max Surge Current=2A, Maximum Operating Temperature=+150C, Minimum Operating Temperature=-65C, Operating Temperature Range=-65Cto+150C, Package / Case=SOD-123, Package Reference=SOD123-2, Peak Reverse Voltage=100V, Vf - Forward Voltage=1.25V, Brand=DiodesIncorporated, Configuration=Single, Datasheet URL=http://www.farnell.com/datasheets/1915529.pdf, Datasheet Version="Rev. 24-2, 10/2013", Factory Pack Quantity=3000, Height=1.25mm, Length=2.85mm, Manufacturer URL=http://www.diodes.com/, Mounting Style=SMD/SMT, Package URL=http://www.diodes.com/datasheets/ds18004.pdf, Packaging=Reel, Product=SwitchingDiodes, Product Category=Diodes-GeneralPurpose,Power,Switching, Recovery Time=4ns, RoHS=True, Series=1N4148, Type=SwitchingDiode, Unit Weight=0.000353oz, Width=1.7mm
D3 D6: library part CMP-1055-00490-1, "Schottky Barrier Diode, 2-Pin SOD-523, Pb-Free, Tape and Reel", Manufacturer="On Semiconductor", PartNumber=BAT54XV2T5G, ComponentLink1Description="Manufacturer URL", ComponentLink1URL=http://www.onsemi.com/, ComponentLink2Description=Datasheet, ComponentLink2URL=http://www.onsemi.cn/pub_link/Collateral/BAT54XV2T1-D.PDF, ComponentLink3Description="Package Specification", ComponentLink3URL=http://www.onsemi.com/pub_link/Collateral/502-01.PDF, Configuration=Single, DatasheetVersion="Rev. 8", IFSM Max (A)=0.6, Mounting Technology="Surface Mount", PackageDescription="2-Pin SOD, Body 1.2 x 0.8 mm", PackageReference=SOD-523-2-502-01, PackageVersion="Rev. E, 09/2010", Packing="Tape and Reel", RoHS=TRUE, trr Max (ns)=5
D4 D5: library part CMP-1060-00604-1, "Zener Voltage Regulator, 500 mW, 2-Pin SOD-123, Pb-Free, Tape and Reel", Manufacturer="On Semiconductor", ComponentLink1Description="Manufacturer URL", ComponentLink1URL=http://www.onsemi.com/, ComponentLink2Description=Datasheet, ComponentLink2URL=http://www.onsemi.com/pub_link/Collateral/MMSZ4678T1-D.PDF, ComponentLink3Description="Package Specification", ComponentLink3URL=http://www.onsemi.com/pub_link/Collateral/425-04.PDF, DatasheetVersion="Rev. 9", Mounting Technology="Surface Mount", P Max (W)=0.5, PackageDescription="2-Pin SOD, Body 1.6 x 2.69 mm", PackageReference=SOD-123-2-425-04, PackageVersion="Rev. G, 10/2009", Packing="Tape and Reel", PartNumber=MMSZ4680T1G, RoHS=Pb-Free, VZ Typ (V)=2.2
Q1: library part CMP-2000-05562-1, "General Purpose Transistor, NPN Silicon, 200 mA, 60 V, -55 to 150 degC, 3-Pin TO-92, RoHS, Bulk", Collector- Base Voltage VCBO=60V, Collector- Emitter Voltage VCEO Max=40V, Collector-Emitter Saturation Voltage=0.3V, Emitter- Base Voltage VEBO=6V, Manufacturer=ONSemiconductor, Maximum DC Collector Current=0.2A, Maximum Operating Temperature=+150C, Maximum Power Dissipation=625mW, Minimum Operating Temperature=-65C, Package / Case=TO-92-3(TO-226), Package Description="3-Pin Transistor Outline, Body 4.825 x 3.685 mm, Pitch 1.27 mm", Package Reference=TO-92-3-29-11, Brand=ONSemiconductor, Configuration=Single, Datasheet URL=https://datasheet.ciiva.com/4725/2n3903-d-285841-4725808.pdf, Datasheet Version="Rev. 8, 08/2012", DC Collector/Base Gain hfe Min=60, Factory Pack Quantity=5000, Gain Bandwidth Product fT=270MHz, Manufacturer URL=http://www.onsemi.com/, Mounting Style=ThroughHole, Mounting Technology=ThroughHole, Packaging=Bulk, Product Category=BipolarTransistors-BJT, RoHS=Details, Transistor Polarity=NPN
Q2 Q3 Q4 Q5: library part CMP-1062-00030-1, "JFET Switching Transistor, N-Channel, 3-Pin SOT-23, Pb-Free, Tape and Reel", Manufacturer="On Semiconductor", Channel Polarity="N Channel", Ciss Max (pF)=14, ComponentLink1Description="Manufacturer URL", ComponentLink1URL=http://www.onsemi.com/, ComponentLink2Description=Datasheet, ComponentLink2URL=http://www.onsemi.com/pub_link/Collateral/MMBF4391LT1-D.PDF, ComponentLink3Description="Package Specification", ComponentLink3URL=http://www.onsemi.cn/pub_link/Collateral/318-08.PDF, Crss Max (pF)=3.5, DatasheetVersion="Rev. 10", IDSS Max (uA)=150000, IDSS Min (uA)=50000, Mounting Technology="Surface Mount", PackageDescription="3-Pin Small Outline Transistor, Body 2.92 x 1.3 mm, Pitch 0.95 mm", PackageReference=SOT-23-3-318-08, PackageVersion="Rev. AP, 11/2009", Packing="Tape and Reel", PartNumber=MMBF4391LT1G, RoHS=Pb-Free, V(BR)GSS Min (V)=30
R1 R3 R4 R5 R6 R8 R9 R11 R12 R13 R14 R15 R16 R31 R32 R33 R34 R35 R36 R37 R38 R39 R40: library part CMP-10850-000017-1, "RES 2.5K OHM 0.6W 0.01% RADIAL", Case/Package=Radial, Max Operating Temperature=125°C, Max Power Dissipation=600mW, Min Operating Temperature=-55°C, Resistance=2.5kR, Resistance Tolerance=0.01%, Resistor Type="Metal Foil", Temperature Coefficient=2ppm/°C, Voltage Rating=300V, Features="Moisture Resistant", Mount="Through Hole", Number of Terminations=2, Packaging=Bulk, Power Rating=600mW, Series=S, Tolerance=0.01%
R2 R7 R10 R17 R18 R19 R25 R26 R27 R28 R29 R30: library part CMP-2100-03671-1, "Chip Resistor, 1 KOhm, +/- 1%, 125 mW, -55 to 155 degC, 0805 (2012 Metric), RoHS, Tape and Reel", Case Code (Imperial)=0805, Case Code (Metric)=2012, Manufacturer=Yageo, Max Operating Temperature=155degC, Max Power Dissipation=125mW, Min Operating Temperature=-55degC, Package Description="2-Pin Surface Mounted Device, Body 2 x 1.25 mm", Package Quantity=1, Resistance=1KOhm, Temperature Coefficient=100ppm/degreesC, Tolerance=1%, Voltage Rating=150V, Case/Package=0805, Composition=ThickFilm, Datasheet URL=http://www.yageo.com/NewPortal/yageodocoutput?fileName=/pdf/R-Chip/PYu-RC_Group_51_RoHS_L_5.pdf, Datasheet Version="Rev. 5, 10/2016", Depth=1.25mm, Height=0.024inch, Lead Free=LeadFree, Length=0.079inch, Manufacturer URL=http://www.yageo.com/, Military Standard=Not, Number of Pins=2, Number of Terminations=2, Package Reference=0805, Packaging=TapeandReel, Power Rating=125mW, REACH SVHC=Unknown, RoHSCompliant=true, Termination=SMD/SMT, Voltage Rating (DC)=150V, Width=0.049inch
R20 R21 R22 R23 R24: library part CMP-02407-004199-1, "RES Thick Film, 100kΩ, 1%, 1W, 100ppm/°C, 2512", Case Code (Imperial)=2512, Case Code (Metric)=6432, Max Operating Temperature=155°C, Max Power Dissipation=1W, Min Operating Temperature=-55°C, Package Quantity=2000, Resistance=100kR, Temperature Coefficient=100ppm/°C, Tolerance=1%, Voltage Rating=500V, Case/Package=2512, Composition="Thick Film", Contact Plating=Tin, Depth=3.15mm, Features="Automotive AEC-Q200", Height=0.6mm, Lead Free="Lead Free", Length=6.3mm, Military Standard=Not, Number of Pins=2, Number of Terminations=2, Packaging="Tape and Reel", Power Rating=1W, Radiation Hardening=No, Termination=SMD/SMT, Voltage Rating (DC)=500V, Weight=0.001429oz, Width=3.15mm
U1: library part CMP-0244-00386-1, "Positive Voltage Regulator, 15V, 4-Pin SOT-89, Tape and Reel", ComponentLink1Description="Manufacturer URL", ComponentLink1URL=http://www.st.com, ComponentLink2Description=Datasheet, ComponentLink2URL=http://www.st.com/internet/com/TECHNICAL_RESOURCES/TECHNICAL_LITERATURE/DATASHEET/CD00000446.pdf, DatasheetVersion=1/02/2011, PackageDescription="3-Pin SOT-89 Package 1.5 mm Pitch, 4.1 mm Lead Span", PackageReference=SOT-89, PackageVersion=2011
U2 U4: library part CMP-29842-000026-1, "DC DC CONVERTER 15V 2W", Case/Package=SIP, Current - Output 1=132mA, Isolation Voltage=5.2kV, Max Input Voltage=5.5V, Max Operating Temperature=85°C, Max Output Power=2W, Max Output Voltage=15V, Min Input Voltage=4.5V, Min Operating Temperature=-40°C, Nominal Input Voltage=5V, Package Quantity=25, Depth=19.5mm, Efficiency=80%, Features=SCP, Height=12.5mm, Isolation=Isolated, Lead Free="Lead Free", Length=19.5mm, Max Input Voltage (DC)=5.5V, Max Output Current=132mA, Max Power Dissipation=2W, Min Input Voltage (DC)=4.5V, Mount="Through Hole", Nominal Output Voltage=15V, Number of Outputs=1, Number of Pins=4, Output Current=132mA, Output Power=2W, Output Voltage=15V, Packaging=Rail/Tube, Pitch=2.54mm, REACH SVHC="No SVHC", RoHS Compliant=Yes, Series="ECONOLINE RxxP2xx", Voltage - Output 1=15V, Weight=4.3g, Width=9.8mm
U3: library part CMP-0359-03074-2, "Dual Channel, Precision Single Supply Operational Amplifier, 0.8 MHz Typical GBW, 0.4 V/us Typical SR, 4 to 44 V, 8-Pin SOIC (S8-8), Commerical, Pb-Free", Linear Technology Part Number=LT1013, Manufacturer="Linear Technology", Channels (#)=2, ComponentLink1Description="Manufacturer URL", ComponentLink1URL=http://www.linear.com/, ComponentLink2Description=Datasheet, ComponentLink2URL=http://cds.linear.com/docs/en/datasheet/10134fd.pdf, ComponentLink3Description="Package Specification", ComponentLink3URL=http://cds.linear.com/docs/en/packaging/05081610_G_SO8.pdf, DatasheetVersion="Rev. D", GBW (MHz) Typical=0.8, Is (mA) Typical=0.35, Mounting Technology="Surface Mount", PackageDescription="8-Pin Plastic Small Outline, Body 4.9 x 3.9 mm, Pitch 1.27 mm", PackageReference=LT-S8-8, PackageVersion="Rev G", PartNumber=LT1013DS8#PBF, RevisionNote="URLs updated", RoHS=Pb-Free, SR (V/us) Typical=0.4, Type=VFB, Vos (mV) Typical=0.04, Vs Max (V)=44, Vs Min (V)=4
U5: library part CMP-09137-000002-1, "IC VREF SHUNT 7.2V TO5", Ambient Temperature Range High=+125°C, Ambient Temperature Range Low=-55°C, Manufacturer="Analog Devices", Max Junction Temp=+150°C, Package=H-8-05-08-1320, Temperature="-55°C to +125°C", Automotive=No, Category=IC, ComponentLink2Description=Datasheet, ComponentLink2URL=https://www.analog.com/media/en/technical-documentation/data-sheets/LTZ1000.pdf, Device Class L1="Integrated Circuits (ICs)", Device Class L2="Power Management ICs", Device Class L3="Voltage References", Digikey Description="IC VREF SHUNT 7.2V TO5", Height=5.969mm, Lead Free=Yes, Manufacturer Part Number=LTZ1000ACH#PBF, Number of Outputs=1, Octopart=https://octopart.com/ltz1000ach%23pbf-analog+devices-88320833, Output Type=Fixed, Reference Type="Buried Zener", RoHS=TRUE, Standoff Height=0.254mm, Temperature Range High=+125°C, Temperature Range Low=-55°C
U6: library part CMP-09116-000242-1, "36V, LOW NOISE, ZERO-DRIFT, 8MHZ"
U7: library part CMP-0244-00408-1, "Negative Voltage Regulator, -15V, 4-Pin SOT-89, Tape and Reel", ComponentLink1Description="Manufacturer URL", ComponentLink1URL=http://www.st.com, ComponentLink2Description=Datasheet, ComponentLink2URL=http://www.st.com/internet/com/TECHNICAL_RESOURCES/TECHNICAL_LITERATURE/DATASHEET/CD00000539.pdf, DatasheetVersion=1/07/2009, PackageDescription="3-Pin SOT-89 Package 1.5 mm Pitch, 4.1 mm Lead Span", PackageReference=SOT-89, PackageVersion=2011
U8 U9: library part CMP-0359-03002-2, "Single Channel, Low Noise High Speed Operational Amplifier, 20 MHz Typical GBW, 6 V/us Typical SR, 8 to 44 V, 8-Pin SOIC (S8-8), Commercial, Pb-Free", Linear Technology Part Number=LT1128, Manufacturer="Linear Technology", Channels (#)=1, ComponentLink1Description="Manufacturer URL", ComponentLink1URL=http://www.linear.com/, ComponentLink2Description=Datasheet, ComponentLink2URL=http://cds.linear.com/docs/en/datasheet/1028fb.pdf, ComponentLink3Description="Package Specification", ComponentLink3URL=http://cds.linear.com/docs/en/packaging/05081610_G_SO8.pdf, DatasheetVersion="Rev. B", GBW (MHz) Typical=20, Is (mA) Typical=7.4, Mounting Technology="Surface Mount", PackageDescription="8-Pin Plastic Small Outline, Body 4.9 x 3.9 mm, Pitch 1.27 mm", PackageReference=LT-S8-8, PackageVersion="Rev G", PartNumber=LT1128CS8#PBF, RevisionNote="URLs updated", RoHS=Pb-Free, SR (V/us) Typical=6, Type=VFB, Vos (mV) Typical=0.01, Vs Max (V)=44, Vs Min (V)=8
U10: library part CMP-0359-03478-2, "Dual Channel, Very Low 1/f Corner Frequency Precision Operational Amplifier, 20 MHz Typical GBW, 6 V/us Typical SR, 3 to 36 V, 8-Pin SOIC (S8-8), Commercial, Pb-Free", Linear Technology Part Number=LT1678, Manufacturer="Linear Technology", Channels (#)=2, ComponentLink1Description="Manufacturer URL", ComponentLink1URL=http://www.linear.com/, ComponentLink2Description=Datasheet, ComponentLink2URL=http://cds.linear.com/docs/en/datasheet/16789fs.pdf, ComponentLink3Description="Package Specification", ComponentLink3URL=http://cds.linear.com/docs/en/packaging/05081610_G_SO8.pdf, GBW (MHz) Typical=20, Is (mA) Typical=2, Mounting Technology="Surface Mount", PackageDescription="8-Pin Plastic Small Outline, Body 4.9 x 3.9 mm, Pitch 1.27 mm", PackageReference=LT-S8-8, PackageVersion="Rev G", PartNumber=LT1678CS8#PBF, RevisionNote="URLs updated", RoHS=Pb-Free, SR (V/us) Typical=6, Type=VFB, Vos (mV) Guaranteed=0.1, Vos (mV) Typical=0.035, Vs Max (V)=36, Vs Min (V)=3
U11: library part CMP-0384-01713-2, "Single Channel RRIO Operational Amplifier, 6.5 MHz BW, 500 mV/us SR, Industrial, 8-pin SOP (RM-8), Tube", Amplifiers Per Package=1, Generic Part Number=ADA4528-1, Input Bias Current=90pA, Input Offset Voltage=300nV, Manufacturer="Analog Devices", Code_JEDEC=MO-187-AA, ComponentLink1Description="Manufacturer URL", ComponentLink1URL=http://www.analog.com/en/index.html, ComponentLink2Description=Datasheet, ComponentLink2URL=http://www.analog.com/static/imported-files/data_sheets/ADA4528-1_4528-2.pdf, ComponentLink3Description="Package Specification", ComponentLink3URL=http://www.analog.com/static/imported-files/packages/PKG_PDF/MSOP%28RM%29/RM_8.pdf, ComponentLink4Description="Reference Circuit", ComponentLink4URL=http://search.analog.com/search/ProductSearch.aspx?query=ada4528-1&amp;locale=en#product-recommendations, DatasheetVersion="Rev. C", Iq/Amp=1.4mA, Mounting Technology="Surface Mount", PackageDescription="8-Pin Mini Small Outline Package, Body 3 x 3 mm, Pitch 0.65 mm", PackageReference=RM-8, Packing=Tube, PartNumber=ADA4528-1ARMZ, RevisionNote="Reference Circuit URL fixed", Slew Rate=500mV/us, Small Signal Bandwidth=6.5MHz, V Span Max=5.5V, V Span Min=2.2V
U12: library part CMP-0017-00649-2, "Low-Power JFET-Input General-Purpose Operational Amplifier, 7 to 36 V, -40 to 85 degC, 8-pin SOIC (D8), Green (RoHS & no Sb/Br)", Manufacturer="Texas Instruments", Rating=Military, Total Supply Voltage(Max)(+5V is 5, +/-5V is 10)=36, Total Supply Voltage(Min)(+5V is 5, +/-5V is 10)=7, CMRR(Min)(dB)=80, Code_JEDEC=MS-012, ComponentLink1Description="Manufacturer URL", ComponentLink1URL=http://www.ti.com/, ComponentLink2Description=Datasheet, ComponentLink2URL=http://www.ti.com/lit/ds/symlink/tl061.pdf, ComponentLink3Description="Package Specification", ComponentLink3URL=http://www.ti.com/litv/pdf/msoi002j, DatasheetVersion=SLOS078J, Eco-Plan="Green (RoHS & no Sb/Br)", GBW(Typ)(MHz)=1, IIB(Max)(pA)=200, Iq per channel(Max)(mA)=0.25, Mounting Technology="Surface Mount", Number of Channels=1, Offset Drift(Typ)(uV/C)=10, PackageDescription="8-Pin Plastic Small Outline, Body 4.9 x 3.9 mm, Pitch 1.27 mm", PackageReference=D0008A, PackageVersion="4040047-3/M, 06/2011", PartNumber=TL061IDR, Slew Rate(Typ)(V/us)=3.5, Sub Family="General Purpose Amplifier, High Supply Voltage Amplifier (>=30V), Low Power Amp (<=500uA)", Vio (25C)(Max)(mV)=6, Vn at 1kHz(Typ)(nV/rtHz)=42
U13: library part CMP-0318-00529-2, "Single 16-Bit Ultra Stable Voltage Output Digital-to-Analog Converter, + / -0.5 LSB INL, -40 to +125 degC, CP-24-5, Pb-Free, Tray", Generic Part Number=AD5760, Manufacturer="Analog Devices", # DAC Outputs=1, ComponentLink1Description="Manufacturer URL", ComponentLink1URL=http://www.analog.com/en/index.html, ComponentLink2Description=Datasheet, ComponentLink2URL=http://www.analog.com/static/imported-files/data_sheets/AD5760.pdf, ComponentLink3Description="Package Specification", ComponentLink3URL=http://www.analog.com/static/imported-files/packages/PKG_PDF/LFCSP(CP)/CP_24_5.pdf, ComponentLink4Description="Product URL", ComponentLink4URL=http://www.analog.com/en/digital-to-analog-converters/da-converters/ad5760/products/product.html, DatasheetVersion=Rev.B, Max V+=16.5V, Mounting Technology="Surface Mount", PackageDescription="24-Lead Lead Frame Chip Scale Package [LFCSP_VQ] 4 x 5 mm Body, Very Thin Quad", PackageReference=CP-24-5, PackageVersion=04-11-2012-B, Packing=Tray, PartNumber=AD5760BCPZ, Resolution (Bits)=16, RevisionNote="Component URL fixed", RoHS=Y, Settling Time=2.5Âµs, Single Supply=No
U14: library part CMP-0394-01041-2, "Single Output LDO, 200 mA, Fixed 2.5 V Output, 2 to 5.5 V Input, with Low IQ, 5-pin SOT (DDC), -40 to 125 degC, Green (RoHS & no Sb/Br)", Manufacturer="Texas Instruments", Accuracy(%)=2, Code_JEDEC=MO-193, ComponentLink1Description="Manufacturer URL", ComponentLink1URL=http://www.ti.com/, ComponentLink2Description=Datasheet, ComponentLink2URL=http://www.ti.com/general/docs/lit/getliterature.tsp?genericPartNumber=TLV70025&fileType=pdf, ComponentLink3Description="Package Specification", ComponentLink3URL=http://www.ti.com/litv/pdf/mpds123d, DatasheetVersion=SLVSA00D, Eco-Plan="Green (RoHS & no Sb/Br)", Fixed Output Options(V)=2.5, Iout(Max)(A)=0.2, Iq(Typ)(mA)=0.03, Mounting Technology="Surface Mount", PackageDescription="5-Pin Plastic Small Outline, Body 2.9 x 1.6 mm, 0.95 mm Pitch", PackageReference=DDC0005A, PackageVersion=4204403-2/E, PartNumber=TLV70025DDCR, SubFamily="Single Channel LDO", Vdo(Typ)(mV)=175, Vin(Max)(V)=5.5, Vin(Min)(V)=2, Vout Adj(Max)(V)=2.5, Vout Adj(Min)(V)=2.5
U15 U17 U19 U20 U21 U22: library part CMP-04892-000026-1, "IC SWITCH"
U16: library part CMP-0394-01056-3, "IC REG LINEAR 3.3V 200MA SOT23-5", Case/Package=TSOT, Dropout Voltage=175mV, Max Input Voltage=5.5V, Max Operating Temperature=125°C, Max Output Current=200mA, Max Output Voltage=3.3V, Max Power Dissipation=500mW, Min Current Limit=220mA, Min Input Voltage=2V, Min Operating Temperature=-40°C, Output Voltage Accuracy=2%, Package Quantity=1, Quiescent Current=30uA, Accuracy=2%, Lead Free="Lead Free", Min Output Voltage=3.3V, Nominal Output Voltage=3.3V, Number of Outputs=1, Number of Pins=5, Number of Regulators=1, Output Current=200mA, Output Type=Fixed, Output Voltage=3.3V, Packaging="Tape and Reel", Polarity=Positive, Power Dissipation=500mW, Radiation Hardening=No, REACH SVHC="No SVHC"
U18: library part CMP-0271-00131-3, "11 MHz, Single Supply, Low Noise, Precision, Rail-to-Rail Output, JFET Amplifier, 4.5 to 36 V, -40 to 125 degC, 8-pin SOIC (D8), Green (RoHS & no Sb/Br)", Manufacturer="Texas Instruments", Rating=Catalog, Total Supply Voltage(Max)(+5V is 5, +/-5V is 10)=36, Total Supply Voltage(Min)(+5V is 5, +/-5V is 10)=4.5, CMRR(Min)(dB)=126, Code_JEDEC=MS-012, ComponentLink1Description="Manufacturer URL", ComponentLink1URL=http://www.ti.com/, ComponentLink2Description=Datasheet, ComponentLink2URL=http://www.ti.com/lit/ds/symlink/opa140.pdf, ComponentLink3Description="Package Specification", ComponentLink3URL=http://www.ti.com/litv/pdf/msoi002j, DatasheetVersion=SBOS498A, Eco-Plan="Green (RoHS & no Sb/Br)", GBW(Typ)(MHz)=11, IIB(Max)(pA)=10, Iq per channel(Max)(mA)=2, Mounting Technology="Surface Mount", Number of Channels=1, Offset Drift(Typ)(uV/C)=0.35, PackageDescription="8-Pin Plastic Small Outline, Body 4.9 x 3.9 mm, Pitch 1.27 mm", PackageReference=D0008A, PackageVersion="4040047-3/M, 06/2011", Packing=TUBE, PartNumber=OPA140AID, Slew Rate(Typ)(V/us)=20, Sub Family="High Supply Voltage Amplifier (>=30V), Low Input Bias Current Amp (<=10pA), Low Noise Amp (<=10nV/rtHz), Low Offset Voltage Amplifier (<=500uV), Precision Amplifier", Vio (25C)(Max)(mV)=0.12
U23: library part CMP-0237-00250-3, "ARM Cortex-M3 32-bit MCU, 128 KB Flash, 20 KB Internal RAM, 37 I/Os, 48-pin LQFP, -40 to 85 degC, Tray", I/Os (High Current)=37, Operating Frequency(F) (Processor speed) (MHz)=72, Supply Voltage(Vcc) min (V)=2, A/D Converter="2x12-bit (10 Channel)", ComponentLink1Description="Manufacturer URL", ComponentLink1URL=http://www.st.com/web/en/home.html, ComponentLink2Description=Datasheet, ComponentLink2URL=http://www.st.com/st-web-ui/static/active/en/resource/technical/document/datasheet/CD00161566.pdf, ComponentLink3Description="Package Specification", ComponentLink3URL=http://www.st.com/st-web-ui/static/active/en/resource/technical/document/datasheet/DM00058181.pdf, Core="ARM Cortex-M3", DatasheetVersion="Rev. 16", FLASH Size (Prog) (kB)=128, Internal RAM Size (kB)=20, Mounting Technology="Surface Mount", PackageDescription="48-Pin Low Profile Quad Flat Package, 7 x 7 mm Body, 0.5 mm Pitch", PackageReference=LQFP48, PackageVersion="Rev. 6, 06/2013", Packing=Tray, PartNumber=STM32F103CBT6

## Via types
v1: diameter 19.68, hole 7.87, Top Layer to Bottom Layer, 5 vias

## Nets (pads, with @x,y where several pads share a name; then routed paths per layer and width w, separated by ;. In a path a pad name is that pad's centre, name@x,y a point inside that pad or via, vN(x,y) a via of type N, cw(c..) or ccw(c..) an arc to the next point about the centre after c; other vN are vias at no path point)
1V8: R30.2
2V5: C13.2 C14.1 U14.5
3V3: C15.2 C16.1 U16.5
5V0: C12.2 C17.2 R29.2 U14.1 U16.1
15V: C2.2 Q1.3 U1.1 U3.6 U6.7 U8.7
+15VA: D3.1 Q2.1 U10.8 U12.7
-15V: C5.1 U7.3 U9.4
-15VA: D6.2 Q5.2 R27.2 U10.4 U12.4
GND: C1.1 C2.1 C4.2 C5.2 C7.1 C12.1 C13.1 C14.2 C15.1 C16.2 C17.1 C18.2 D2.2 R11.1 R12.1 R13.1 R14.1 U1.2 U2.5 U3.2 U4.7 U5.7 U6.4 U6.9 U7.1 U8.4 U9.3 U9.7 U14.2 U16.2
Main_Input: R20.1
NetC1_2: C1.2 U1.3 U2.7
NetC3_1: C3.1 Q1.1 U5.1
NetC3_2: C3.2 R7.2
NetC4_1: C4.1 U4.5 U7.2
NetC6_1: C6.1 R8.2 R13.2 U6.2
NetC6_2: C6.2 R15.2 U6.6 U8.3
NetC7_2: C7.2 R5.1 U3.3 U5.5
NetC8_1: C8.1 R17.1 R25.1 U10.6
NetC8_2: C8.2 R17.2 R19.1 U10.7
NetC11_1: C11.1 R25.2 R28.1 U10.2
NetC11_2: C11.2 R26.1 R28.2 U10.1
NetC18_1: C18.1 R30.1 U16.3
NetD1_1: D1.1 U3.5
NetD2_1: D2.1 U5.2
NetD3_2: D3.2 D6.1 Q3.2 Q3.3 Q4.1 R24.2 U11.3
NetD4_1: D4.1 Q2.2 R18.2 U10.5
NetD4_2: D4.2 D5.1 U12.2 U12.6
NetD5_2: D5.2 Q5.1 U10.3
NetQ1_2: Q1.2 R2.1
NetQ2_3: Q2.3 R18.1
NetQ5_3: Q5.3 R27.1
NetR1_1: R1.1 R9.2
NetR2_2: R2.2 U3.7
NetR3_1: R3.1 R10.1 R11.2 U5.6
NetR4_1: R4.1 U3.1 U5.8
NetR7_1: R7.1 R10.2 U3.8
NetR14_2: R14.2 U3.4 U5.4
NetR15_1: R15.1 R16.2 U9.2
NetR20_2: R20.2 R21.1
NetR21_2: R21.2 R22.1
NetR22_2: R22.2 R23.1
NetR23_2: R23.2 R24.1
NetR29_1: R29.1 U14.3
NetR31_2: R31.2 U15.13
NetR32_2: R32.2 U15.1
NetR33_2: R33.2 U15.3
NetR34_2: R34.2 U17.13
NetR35_2: R35.2 U17.1
NetR36_2: R36.2 U17.3
NetR37_2: R37.2 U20.3
NetR38_2: R38.2 U21.13
NetR39_2: R39.2 U21.1
NetR40_2: R40.2 U21.3
NetU2_1: U2.1 U4.1
NetU2_2: U2.2 U4.2
NetU11_2: U11.2 U11.6 U12.3
NetU17_2: U17.2 U17.5
SGND: C9.1 C10.2
To_Integrator: R31.1 R32.1 R33.1 R34.1 R35.1 R36.1 R37.1 R38.1 R39.1 R40.1
VBS+: C9.2 Q3.1 R19.2 U11.7
VBS-: C10.1 Q4.2 Q4.3 R26.2 U11.4
VREF_5V: R6.1 R9.1 R12.2 U6.3
VREF_10V: R8.1 U8.2 U8.6 U15.2 U15.5 U15.12 U17.12
VREF_-10V: R16.1 U9.6 U20.5 U21.2 U21.5 U21.12
VREF_RAW: D1.2 R1.2 R3.2 R4.2 R5.2 R6.2 U5.3